# Altium PCB MicroSD карта.PcbDoc
Units mil, origin at the board's own origin, x right, y up, seen from the top; angles counter-clockwise.
Board outline not stored, 2 copper layers (Top Layer, Bottom Layer); 7 components, 0 nets, 51 pads, 11 vias.
Unrouted connection lines stored in the file: 1.
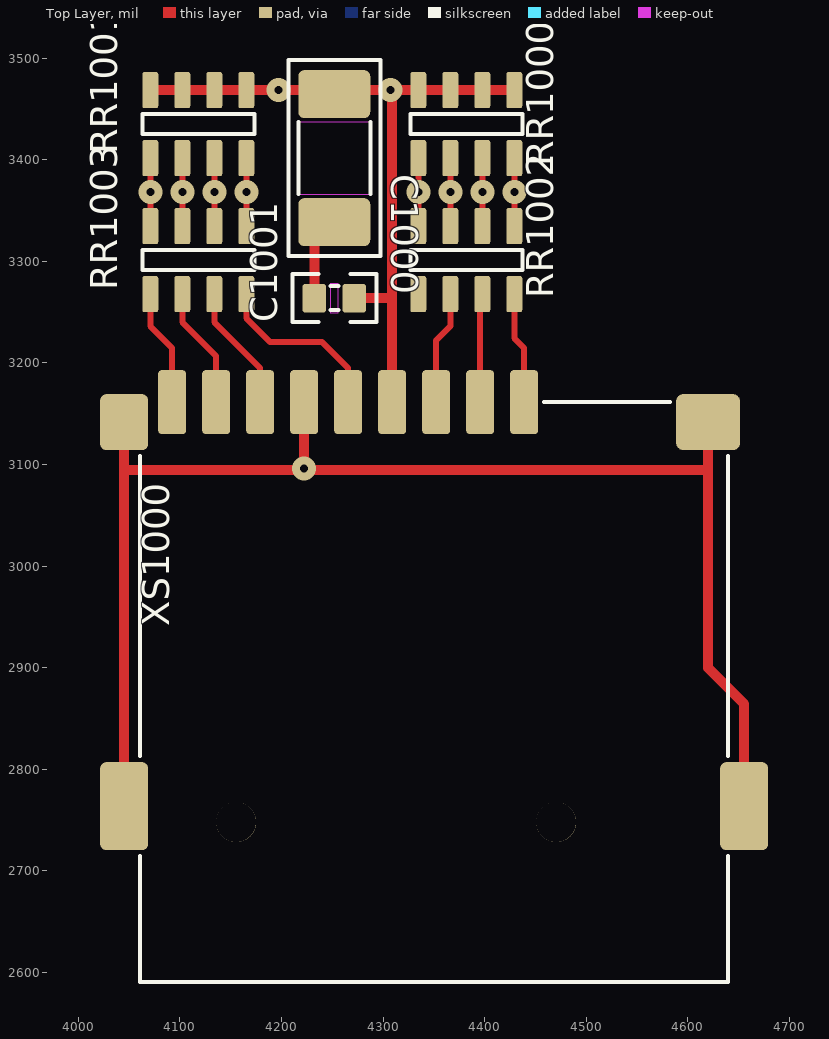
[diagram p0: Top Layer view]
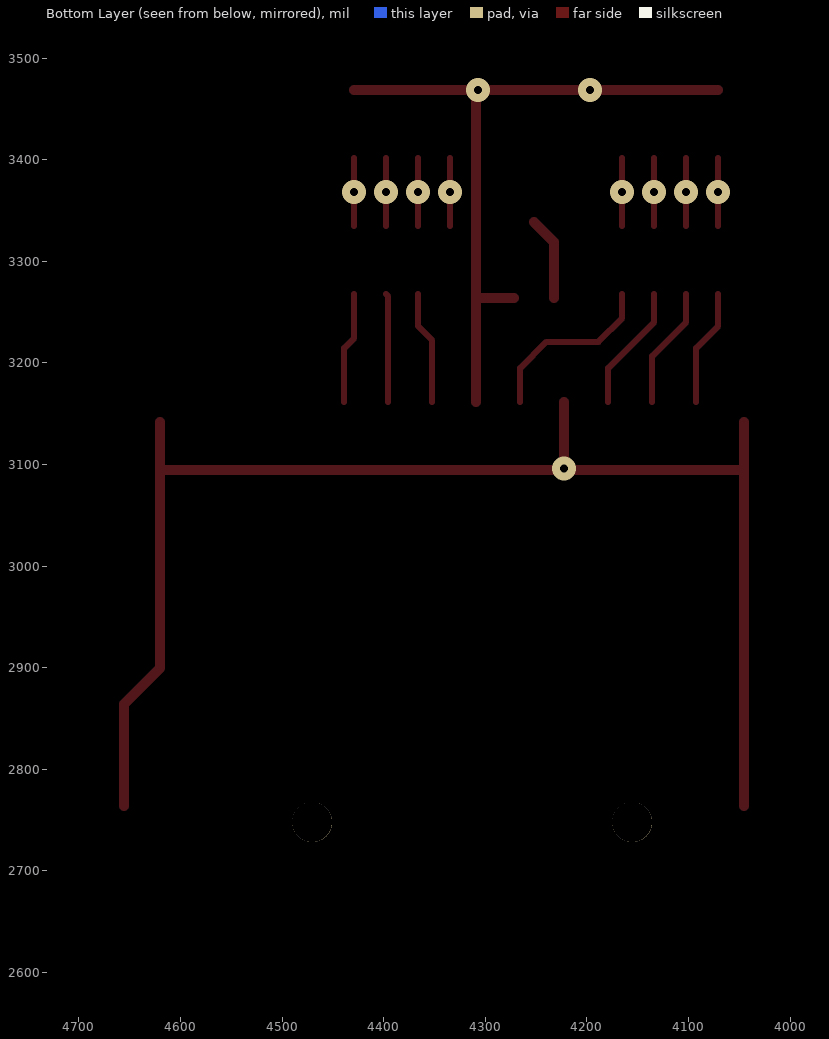
[diagram p1: Bottom Layer view, seen from below]

## Layer stack, top to bottom
Top Solder: solder mask 0.4, Solder Resist, Dk 3.5
Top Layer: signal copper 1.4
Dielectric 1: dielectric 12.6, FR-4, Dk 4.8
Bottom Layer: signal copper 1.4
Bottom Solder: solder mask 0.4, Solder Resist, Dk 3.5

## Design rules (kind name [scope] priority, off if disabled: settings)
RoomDefinition Sheet1 [InComponentClass('Sheet1')] p1: confinementstyle=ConfineIn formatcopy=TRUE lockcomponents=FALSE outline 4007.87,2393.7 4716.54,2393.7 4716.54,3535.43 4007.87,3535.43

## Components (designator, comment, footprint, x,y, rotation, side; value= is the part's Value field where it differs from the comment)
C1000 "47,0" CAP1206 4251.97,3401.57 r270 top
C1001 "0,1" CAP0402 4251.97,3263.78 r180 top
RR1000 "47K" CAY16 4334.65,3401.57 r90 top
RR1001 "47K" CAY16 4070.87,3401.57 r90 top
RR1002 "100" CAY16 4429.13,3334.65 r270 top
RR1003 "100" CAY16 4165.35,3334.65 r270 top
XS1000 "SD card" 112J-TDAR-R-SDCARD 4312.91,2688.98 r0 top

## Footprints (in the part's own frame and the unit in brackets; to place one, negate y for a bottom-side part, rotate by r counter-clockwise, add the part's x,y. Pads: shape width x height; smd on the part's side, far side on the other; paste and mask are expansions set on the pad)
112J-TDAR-R-SDCARD [mm]
  round 1 hole 1 unplated: 0(-4,1.5) 0(4,1.5)
  rrect25% 0.7x1.6 smd: 1(3.2,12) 2(2.1,12) 3(1,12) 4(-0.1,12) 5(-1.2,12) 6(-2.3,12) 7(-3.4,12) 8(-4.5,12) 9(-5.6,12)
  rrect25% 1.2x2.2 smd: 10(-6.8,1.9) 10(8.7,1.9)
  rrect25% 1.2x1.4 smd: 10(-6.8,11.5)
  rrect25% 1.6x1.4 smd: 10(7.8,11.5)
  silkscreen extent -6.4,-2.5 8.3,12, body extent -7.4,-2.52 9.3,12.28, height 1.85
CAP0402 [mm]
  rrect25% 0.59x0.72 smd: 1(-0.5,0) 2(0.5,0)
  Top Layer keep-out region: -0.1,0.36 -0.1,-0.36 0.1,-0.36 0.1,0.36
  silkscreen extent -1.05,-0.6 1.05,0.6, body extent -0.5,-0.25 0.5,0.25, height 0.49
CAP1206 [mm]
  rrect25% 1.2x1.8 smd: 1(-1.6,0) 2(1.6,0)
  Top Layer keep-out region: -0.9,-0.9 0.9,-0.9 0.9,0.9 -0.9,0.9
  silkscreen extent -2.45,-1.15 2.45,1.15, body extent -1.6,-0.8 1.6,0.8, height 1
CAY16 [mm]
  rrect25% 0.9x0.4 smd: 1(0,0) 2(0,-0.8) 3(0,-1.6) 4(0,-2.4) 5(1.7,-2.4) 6(1.7,-1.6) 7(1.7,-0.8) 8(1.7,0)
  silkscreen extent 0.6,-2.6 1.1,0.2, body extent -0.45,-2.8 2.15,0.4, height 0.73

## Part data
C1000: library part CAP_1206, "Конденсатор чип", Номинал=47,0, Тип компонента="Конденсатор чип", Тип корпуса=1206, Тип монтажа=Поверхностный
C1001: library part CAP_0402, "Конденсатор чип", Номинал=0,1, Тип компонента="Конденсатор чип", Тип корпуса=0402, Тип монтажа=Поверхностный
RR1000 RR1001 RR1002 RR1003: library part RESASM_CAY16, "Сборка резисторная", Параметры="0.062Вт 50В", Производитель=Bourns, Тип компонента="Сборка резисторная", Тип монтажа=Поверхностный
  RR1000 RR1001: Номинал=47K
  RR1002 RR1003: Номинал=100
XS1000: library part 112J-TDAR-R-SDCARD, "Слот MMC", Наименование=112J-TDAR-R-SDCARD, Тип компонента="Слот MMC", Тип монтажа=Поверхностный

## Via types
v1: diameter 23.62, hole 7.87, Top Layer to Bottom Layer, tented both sides, 11 vias

## Nets (pads, with @x,y where several pads share a name; then routed paths per layer and width w, separated by ;. In a path a pad name is that pad's centre, name@x,y a point inside that pad or via, vN(x,y) a via of type N, cw(c..) or ccw(c..) an arc to the next point about the centre after c; other vN are vias at no path point)
pads on no net: C1000.1 C1000.2 C1001.1 C1001.2 RR1000.1 RR1000.2 RR1000.3 RR1000.4 RR1000.5 RR1000.6 RR1000.7 RR1000.8 RR1001.1 RR1001.2 RR1001.3 RR1001.4 RR1001.5 RR1001.6 RR1001.7 RR1001.8 RR1002.1 RR1002.2 RR1002.3 RR1002.4 RR1002.5 RR1002.6 RR1002.7 RR1002.8 RR1003.1 RR1003.2 RR1003.3 RR1003.4 RR1003.5 RR1003.6 RR1003.7 RR1003.8 XS1000.0 XS1000.1 XS1000.2 XS1000.3 XS1000.4 XS1000.5 XS1000.6 XS1000.7 XS1000.8 XS1000.9 XS1000.10
copper on no net: | length 3596.1
  Top Layer w5.91: 4070.87,3267.72 4070.87,3236.22 4092.44,3214.65 4092.44,3161.42 ; 4070.87,3334.65 v1(4070.87,3368.11) 4070.87,3401.57 ; 4102.36,3267.72 4102.36,3240.16 4135.75,3206.77 4135.75,3161.42 ; 4102.36,3334.65 v1(4102.36,3368.11) 4102.36,3401.57 ; 4133.86,3267.72 4133.86,3240.16 4179.06,3194.96 4179.06,3161.42 ; 4133.86,3334.65 v1(4133.86,3368.11) 4133.86,3401.57 ; 4165.35,3267.72 4165.35,3244.09 4188.64,3220.81 4239.82,3220.81 4265.67,3194.96 4265.67,3161.42 ; 4165.35,3334.65 v1(4165.35,3368.11) 4165.35,3401.57 ; 4334.65,3334.65 4334.65,3401.57 ; 4352.28,3161.42 4352.28,3222.36 4366.14,3236.22 4366.14,3267.72 ; 4366.14,3334.65 v1(4366.14,3368.11) 4366.14,3401.57 ; 4395.59,3161.42 4395.59,3265.67 4397.64,3267.72 ; 4397.64,3334.65 v1(4397.64,3368.11) 4397.64,3401.57 ; 4429.13,3267.72 4429.13,3224.41 4438.9,3214.65 4438.9,3161.42 ; 4429.13,3334.65 v1(4429.13,3368.11) 4429.13,3401.57
  Top Layer w9.84: 4045.2,2763.78 4045.2,3094.49 ; 4045.2,3141.73 4045.2,3094.49 ; 4070.87,3468.5 4102.36,3468.5 4133.86,3468.5 4165.35,3468.5 v1(4196.85,3468.5) v1(4307.09,3468.5) ; v1(4222.36,3096.38) 4222.36,3161.42 ; 4232.28,3263.78 4232.28,3318.9 4251.97,3338.58 ; 4271.65,3263.78 4308.98,3263.78 ; 4308.98,3161.42 4308.98,3263.78 ; 4429.13,3468.5 4397.64,3468.5 4366.14,3468.5 4334.65,3468.5 v1(4307.09,3468.5) ; 4616.06,3094.49 4045.2,3094.49 ; 4620,3141.73 4620,2899.69 4655.43,2864.25 4655.43,2763.78 ; v1(4307.09,3468.5) 4308.98,3466.61 4308.98,3263.78
  other v1: 4334.65,3368.11